# EAGLE board PCB v42 (EAGLE 9.7.0)
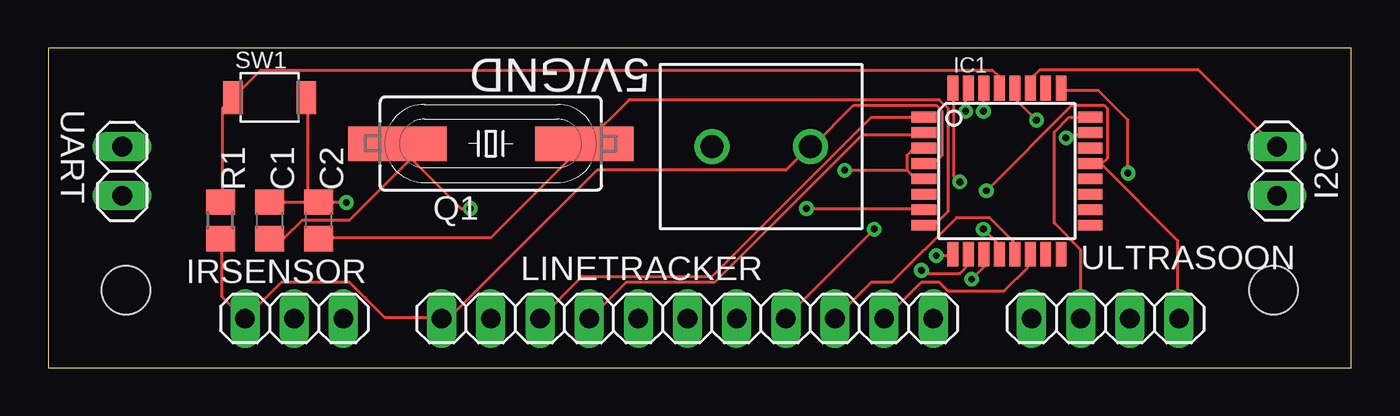
[diagram p0: board, top side]
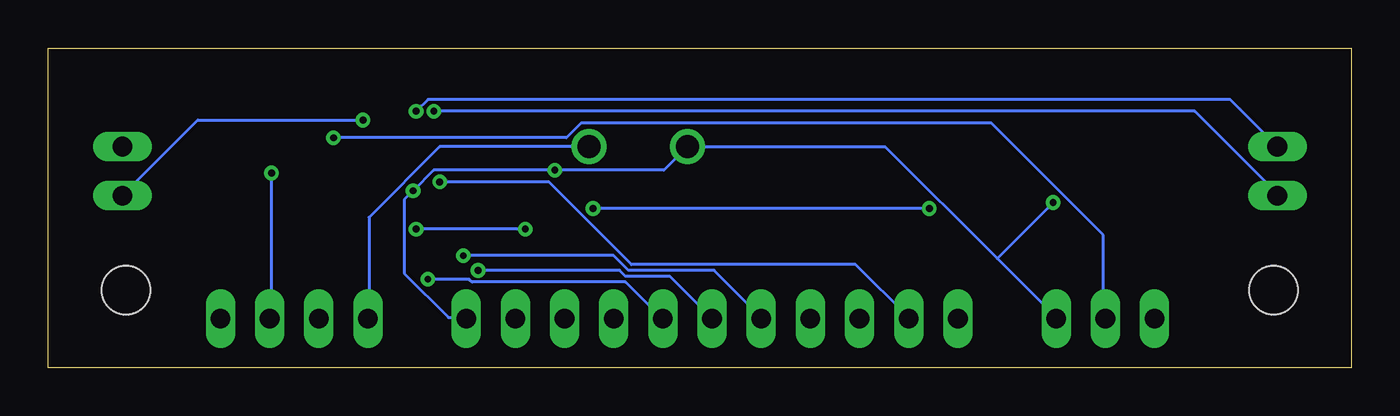
[diagram p1: board, bottom side, seen from below]

Size 67.31 x 16.51 mm. Coordinates in mm from the lower left corner, seen from the top.
Outline: 0,16.51 0,0 67.31,0 67.31,16.51 0,16.51
Copper layers (1*16): Top 0.035mm / dielectric 1.5mm / Bottom 0.035mm
Design rules "default *": minimum track width 6mil, minimum drill 0.35mm, track to track 6mil, track to pad 6mil, pad to pad 6mil, via to via 6mil, smd to smd 6mil, copper to edge 40mil, drill to drill 6mil, minimum pad ring 10mil, minimum via ring 8mil, stop-mask expansion 4mil, vias tented up to drill 0mil, thermal gap 10mil
Holes 2.5 mm at 4,4 63.31,4

## Footprints (pad centres in the part's own frame; a part is rotated, then mirrored left to right if it is on the bottom)
TERMBLK_508-2N = drill 1.2: 1 0,0; 2 5.08,0
C0805 = smd 1.3 x 1.5: 1 -0.95,0; 2 0.95,0
1X02 = drill 1.016 long: 1 -1.27,0; 2 1.27,0
TQFP32-08 = smd 1.27 x 0.559: 1 -4.293,2.8; 2 -4.293,2; 3 -4.293,1.2; 4 -4.293,0.4; 5 -4.293,-0.4; 6 -4.293,-1.2; 7 -4.293,-2; 8 -4.293,-2.8; 17 4.293,-2.8; 18 4.293,-2; 19 4.293,-1.2; 20 4.293,-0.4; 21 4.293,0.4; 22 4.293,1.2; 23 4.293,2; 24 4.293,2.8 | smd 0.559 x 1.27: 9 -2.8,-4.293; 10 -2,-4.293; 11 -1.2,-4.293; 12 -0.4,-4.293; 13 0.4,-4.293; 14 1.2,-4.293; 15 2,-4.293; 16 2.8,-4.293; 25 2.8,4.293; 26 2,4.293; 27 1.2,4.293; 28 0.4,4.293; 29 -0.4,4.293; 30 -1.2,4.293; 31 -2,4.293; 32 -2.8,4.293
1X03 = drill 1.016 long: 1 -2.54,0; 2 0,0; 3 2.54,0
1X11 = drill 1.016 long: 1 -12.7,0; 2 -10.16,0; 3 -7.62,0; 4 -5.08,0; 5 -2.54,0; 6 0,0; 7 2.54,0; 8 5.08,0; 9 7.62,0; 10 10.16,0; 11 12.7,0
SM49 = smd 5.08 x 1.778: 1 -4.826,0; 2 4.826,0
R0805 = smd 1.3 x 1.5: 1 -0.95,0; 2 0.95,0
SW2-2.6-3.0X2.5X1.2+0.4MM = smd 1 x 1.7: 1 -1.9,0; 2 1.9,0
1X04 = drill 1.016 long: 1 -3.81,0; 2 -1.27,0; 3 1.27,0; 4 3.81,0

## Placement (x,y rotation side)
5V/GND  2828XX-2282837-2  [TERMBLK_508-2N]  34.29,11.43 0 top
C1  22pF  [C0805]  11.43,7.62 270 top
C2  22pF  [C0805]  13.97,7.62 90 top
I2C  PINHD-1X2  [1X02]  63.48,10.16 270 top
IC1  ATMEGA328P  [TQFP32-08]  49.53,10.16 0 top
IRSENSOR  PINHD-1X3  [1X03]  12.7,2.54 0 top
LINETRACKER  PINHD-1X11  [1X11]  33.02,2.54 180 top
Q1  16MHz  [SM49]  22.86,11.58 180 top
R1  4.7k  [R0805]  8.89,7.62 90 top
SW1  B3U-1000P-2P-SMD  [SW2-2.6-3.0X2.5X1.2+0.4MM]  11.43,13.97 0 top
UART  PINHD-1X2  [1X02]  3.81,10.16 90 top
ULTRASOON  PINHD-1X4  [1X04]  54.61,2.54 0 top

## Library data of the parts
5V/GND = Connector; CATEGORY: Connector; DESCRIPTION: 2 Position Wire to Board Terminal Block Horizontal with Board 5.08 mm Through Hole; MANUFACTURER: TE Connectivity; MPN: 282837-2; OPERATING_TEMPERATURE: -40°C to +105°C; PART_STATUS: ACTIVE; ROHS_COMPLIANCE: RoHS Compliant; SERIES: 282837; SUBCATEGORY: Terminal Block; TYPE: Side Wire Entry
C1 C2 = rcl; SPICEPREFIX: C
I2C IRSENSOR LINETRACKER UART ULTRASOON = Connector; CATEGORY: CONNECTOR; SUB-CATEGORY: PIN-HEADER
IC1 = IC_Embedded; CATEGORY: IC_Embedded; MANUFACTURER: Microchip; MPN: ATmega328P-MMH; OPERATING_TEMP: -40 to 85 °C; PART_STATUS: Active; SUB-CATEGORY: Microcontroller
Q1 = crystal; OC_FARNELL: unknown; OC_NEWARK: unknown
R1 = rcl; SPICEPREFIX: R
SW1 = One_Dimensional_Pong; MPN: B3U-1000P-2P-SMD

## Nets
0: 5V/GND.1 C1.1 C2.2 IC1.3 IC1.5 IC1.21 IRSENSOR.3 LINETRACKER.1 SW1.2 ULTRASOON.4
AREF: IC1.20
AVCC: IC1.18
N$1: C2.1 IC1.8 Q1.1
N$2: C1.2 IC1.7 Q1.2
N$3: IC1.29 R1.2 SW1.1
N$4: IC1.32 LINETRACKER.10
N$5: IC1.2 LINETRACKER.8
N$6: IC1.9 LINETRACKER.7
N$7: IC1.10 LINETRACKER.6
N$8: IC1.11 LINETRACKER.5
N$9: IC1.24 ULTRASOON.2
N$10: IC1.12 LINETRACKER.4
N$11: IC1.13 LINETRACKER.3
N$12: IC1.25 ULTRASOON.3
N$14: IC1.23 IRSENSOR.2
N$15: IC1.1 LINETRACKER.9
N$16: IC1.30 UART.2
N$17: IC1.31 UART.1
N$18: I2C.1 IC1.27
N$19: I2C.2 IC1.28
N$20: IC1.14 LINETRACKER.2
V+: 5V/GND.2 IC1.4 IRSENSOR.1 LINETRACKER.11 R1.1 ULTRASOON.1
VCC1: IC1.6

## Tracks (layer width: path | path; a pad name or v marks a point on that pad's centre or on a via)
0  (via drill 0.35)
  Top 0.152: 54.41,10.52 53.95,10.52 IC1.21 54.41,10.52 | 54.41,10.52 58.37,6.55 58.37,2.59 ULTRASOON.4 | 13.41,8.53 13.87,8.53 C2.2 | 13.41,8.53 11.43,8.53 C1.1 | 13.41,8.53 13.41,13.87 SW1.2 | 13.41,8.53 C2.2 | 44.35,10.21 44.65,9.91 45.11,9.91 IC1.5 | 44.35,10.21 44.35,10.97 44.65,11.28 45.11,11.28 IC1.3 | v41.15,10.21 44.35,10.21 | v15.39,8.53 14.02,8.53 C2.2 | 54.41,10.52 54.71,10.82 54.71,13.41 54.56,13.56 52.88,13.56 v48.46,9.14
  Bottom 0.152: 18.29,5.64 24.08,11.43 5V/GND.1 35.51,10.21 v41.15,10.21 47.4,10.21 v48.46,9.14 48.92,8.69 48.92,4.88 46.63,2.59 45.72,2.59 LINETRACKER.1 | 18.29,5.64 15.24,2.59 IRSENSOR.3 | 18.29,5.64 v15.39,8.53
N$1
  Top 0.152: IC1.8 45.26,7.47 45.87,7.47 46.48,8.08 46.48,13.41 46.02,13.87 30.02,13.87 27.74,11.58 Q1.1 27.58,11.43 22.86,6.71 14.02,6.71 C2.1
N$2  (via drill 0.35)
  Top 0.152: v39.17,8.23 45.11,8.23 IC1.7 | v21.79,8.23 21.34,8.23 18.75,10.82 | 18.75,10.82 18.14,11.43 Q1.2 18.75,10.82 | 18.75,10.82 15.54,7.62 13.11,7.62 12.19,6.71 11.43,6.71 C1.2
  Bottom 0.152: v21.79,8.23 v39.17,8.23
N$3
  Top 0.152: IC1.29 49.07,14.48 49.07,15.09 48.77,15.39 10.97,15.39 9.6,14.02 SW1.1 9.45,13.87 8.99,13.41 8.99,8.69 R1.2
N$4  (via drill 0.35)
  Top 0.152: v47.09,9.6 46.79,9.91 46.79,14.33 IC1.32
  Bottom 0.152: v47.09,9.6 41.45,9.6 37.19,5.33 25.6,5.33 22.86,2.59 LINETRACKER.10
N$5
  Top 0.152: IC1.2 45.11,12.04 42.06,12.04 34.44,4.42 29.87,4.42 28.04,2.59 LINETRACKER.8
N$6  (via drill 0.35)
  Top 0.152: v45.87,5.79 46.63,5.79 IC1.9
  Bottom 0.152: v45.87,5.79 38.1,5.79 37.34,5.03 32.92,5.03 30.48,2.59 LINETRACKER.7
N$7  (via drill 0.35)
  Top 0.152: v45.11,5.03 45.26,4.88 47.09,4.88 47.4,5.18 47.4,5.79 IC1.10
  Bottom 0.152: v45.11,5.03 37.8,5.03 37.49,4.72 35.2,4.72 LINETRACKER.6
N$8  (via drill 0.35)
  Top 0.152: v47.7,4.57 48.31,5.18 48.31,5.79 IC1.11
  Bottom 0.152: v47.7,4.57 45.57,4.57 45.41,4.42 37.49,4.42 35.66,2.59 LINETRACKER.5
N$9
  Top 0.152: ULTRASOON.2 53.34,6.1 51.97,7.47 51.97,12.19 52.73,12.95 53.8,12.95 IC1.24
N$10  (via drill 0.35)
  Top 0.152: v48.31,7.16 49.07,6.4 49.07,5.94 IC1.12 | v42.67,7.16 38.1,2.59 LINETRACKER.4
  Bottom 0.152: v42.67,7.16 v48.31,7.16
N$11
  Top 0.152: LINETRACKER.3 42.52,4.42 43.59,4.42 46.94,7.77 48.62,7.77 49.84,6.55 49.84,5.94 IC1.13
N$12  (via drill 0.35)
  Top 0.152: v55.78,10.06 55.78,12.8 54.25,14.33 52.43,14.33 IC1.25
  Bottom 0.152: v55.78,10.06 55.78,2.59 ULTRASOON.3
N$14  (via drill 0.35)
  Top 0.152: v52.58,11.89 52.73,12.04 53.8,12.04 IC1.23
  Bottom 0.152: v52.58,11.89 40.54,11.89 39.78,12.65 18.59,12.65 12.8,6.86 12.8,2.59 IRSENSOR.2
N$15
  Top 0.152: LINETRACKER.9 27.58,4.72 34.29,4.72 42.52,12.95 45.11,12.95 IC1.1
N$16  (via drill 0.35)
  Top 0.152: v48.31,13.26 48.31,14.33 IC1.30
  Bottom 0.152: v48.31,13.26 47.7,13.87 6.25,13.87 UART.2
N$17  (via drill 0.35)
  Top 0.152: v47.4,13.26 47.4,14.33 IC1.31
  Bottom 0.152: v47.4,13.26 8.08,13.26 3.81,8.99 UART.1
N$18
  Top 0.152: IC1.27 50.75,14.48 50.75,14.94 51.21,15.39 59.44,15.39 63.4,11.43 I2C.1
N$19  (via drill 0.35)
  Top 0.152: v51.05,12.8 49.99,13.87 49.99,14.33 IC1.28
  Bottom 0.152: v51.05,12.8 59.59,12.8 63.4,8.99 I2C.2
N$20
  Top 0.152: IC1.14 50.6,5.79 50.6,5.18 49.38,3.96 46.48,3.96 46.02,4.42 45.11,4.42 43.28,2.59 LINETRACKER.2
V+
  Top 0.152: R1.1 8.99,6.55 8.99,3.66 10.06,2.59 IRSENSOR.1 12.04,4.42 15.54,4.42 17.37,2.59 20.27,2.59 LINETRACKER.11 20.42,2.59 20.73,2.59 28.35,10.21 38.1,10.21 39.32,11.43 5V/GND.2 39.47,11.43 41.6,13.56 45.87,13.56 46.18,13.26 46.18,10.97 45.87,10.67 45.26,10.67 IC1.4
  Bottom 0.152: 5V/GND.2 47.09,11.43 50.75,7.77 50.75,2.59 ULTRASOON.1